# EAGLE board main (EAGLE 7.7.0)
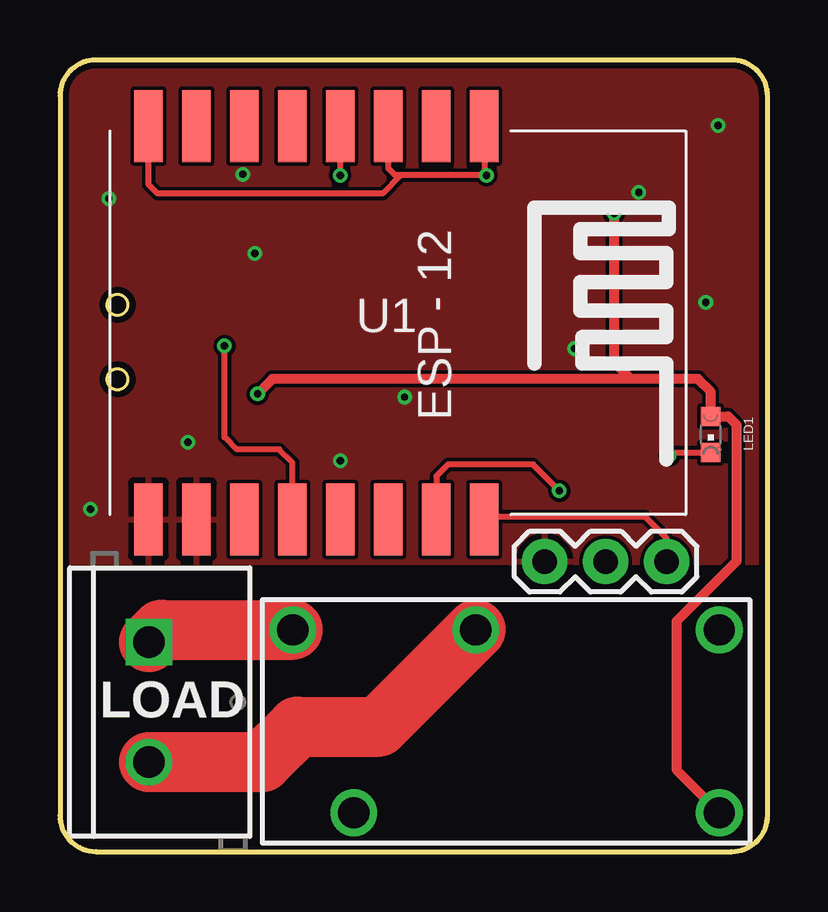
[diagram p0: board, top side]
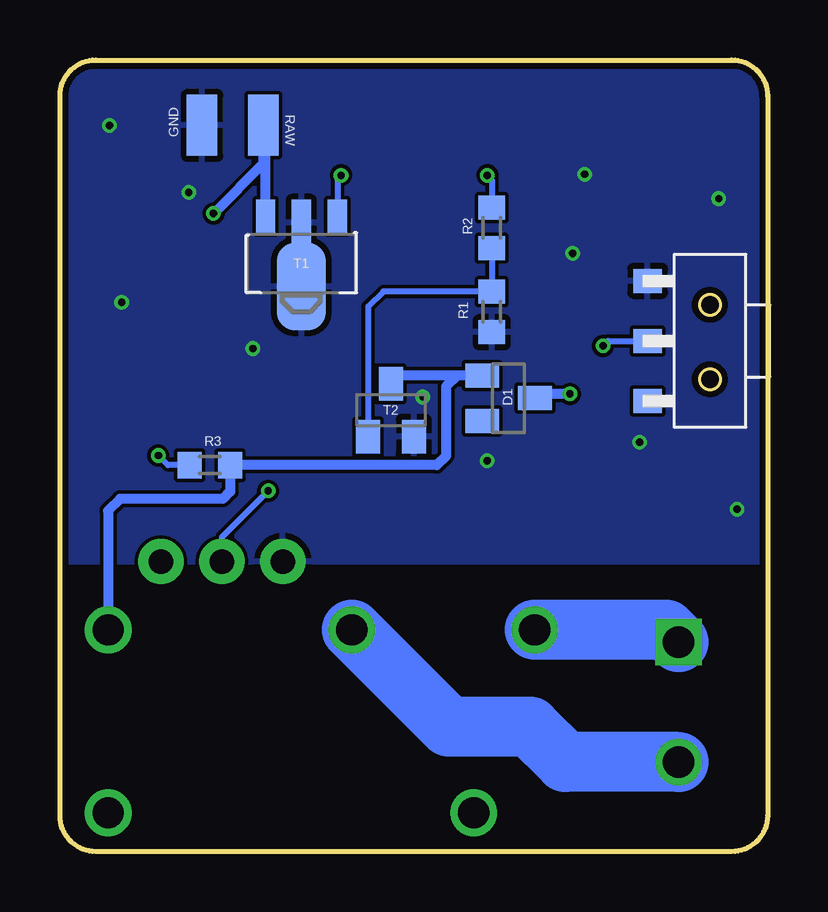
[diagram p1: board, bottom side, seen from below]

Size 29.5 x 33 mm. Coordinates in mm from the lower left corner, seen from the top.
Outline: 28,33 1.5,33 arc90 0,31.5 0,1.5 arc90 1.5,0 28,0 arc90 29.5,1.5 29.5,31.5 arc90 28,33
Copper layers (1*16): Top 0.035mm / dielectric 1.5mm / Bottom 0.035mm
Design rules "SeeedStudio_2layer_DRU": minimum track width 6mil, minimum drill 12mil, track to track 6mil, track to pad 6mil, pad to pad 6mil, via to via 6mil, smd to smd 0mil, copper to edge 10mil, drill to drill 10mil, minimum pad ring 10mil, minimum via ring 6mil, stop-mask expansion 2mil, vias tented up to drill 100mil, thermal gap 10mil

## Footprints (pad centres in the part's own frame; a part is rotated, then mirrored left to right if it is on the bottom)
SOT23 = smd 1 x 1.4: 1 -0.95,-1.1; 2 0.95,-1.1; 3 0,1.1
SMD1,27-2,54 = smd 1.27 x 2.54: 1 0,0
1X03 = drill 1.016 pad 1.88: 1 0,0; 2 2.54,0; 3 5.08,0
SCREWTERMINAL-5MM-2 = drill 1.3 square: 1 0,0 | drill 1.3: 2 5,0
CHIPLED_0603 = smd 0.8 x 0.8: A 0,-0.75; C 0,0.75
R0603 = smd 1 x 1.1: 1 -0.85,0; 2 0.85,0
SOT150P400X160-4N = smd 0.8 x 1.4: 1 -1.499,-1.981; 3 1.499,-1.981 | smd 0.8 x 1.9: 2 0,-1.727 | smd 2.032 x 3.65: 4 0,0.94
SOT23-BEC = smd 1 x 1.4: B -0.95,-1.1; C 0,1.1; E 0.95,-1.1
ESP12-SMD = smd 3 x 1.2: ADC -8.3,3.8; CH_PD -8.3,1.8; GND 8.1,-8.2; GPIO0 8.1,-2.2; GPIO2 8.1,-4.2; GPIO4 8.1,1.8; GPIO5 8.1,-0.2; GPIO12 -8.3,-4.2; GPIO13 -8.3,-6.2; GPIO14 -8.3,-2.2; GPIO15 8.1,-6.2; GPIO16 -8.3,-0.2; RESET -8.3,5.8; RXD0 8.1,3.8; TXD0 8.1,5.8; VCC -8.3,-8.2
RELAY-G5Q = drill 1.3: 1 8.89,3.81; 2 -1.27,3.81; 3 -8.89,3.81; 4 -6.35,-3.81; 5 8.89,-3.81
AYZ0203AGRLC = smd 1 x 1.2: P$1 0,2.6; P$2 -2.5,2.6; P$3 2.5,2.6

## Placement (x,y rotation side)
D1  [SOT23]  10.8,18.9 270 bottom
GND  WIREPADSMD1,27-254  [SMD1,27-2,54]  23.58,30.28 0 bottom
J1  [1X03]  25.29,12.09 180 top
JP3  Load  [SCREWTERMINAL-5MM-2]  3.71,8.73 270 top
LED1  [CHIPLED_0603]  27.13,17.39 180 top
R1  10k  [R0603]  11.5,22.5 90 bottom
R2  1k  [R0603]  11.5,26 90 bottom
R3  250  [R0603]  23.25,16.11 0 bottom
RAW  WIREPADSMD1,27-254  [SMD1,27-2,54]  21.02,30.28 0 bottom
T1  [SOT150P400X160-4N]  19.43,24.5 180 bottom
T2  [SOT23-BEC]  15.7,18.4 0 bottom
U1  [ESP12-SMD]  11.89,21.95 270 top
U$6  RELAYPTH  [RELAY-G5Q]  18.6,5.43 0 top
U$9  AYZ0203AGRLC  [AYZ0203AGRLC]  2.4,21.29 90 bottom

## Library data of the parts
D1 = semicon-smd-ipc
GND RAW = wirepad
J1 = SparkFun-Connectors
JP3 U$6 = SparkFun
LED1 = led
R1-R3 = rcl
T1 = STM-STM8S003_L78LxxUTR; MPN: L78L33ACUTR; OC_FARNELL: 2253467; OC_NEWARK: 89K1361; PACKAGE: SOT-89; SUPPLIER: STMicroelectronics
T2 = transistor
U1 = esp8266modules
U$9 = AYZ0203AGRLC

## Nets
3.3V: T1.1 U1.CH_PD U1.RESET U1.VCC
220-IN: JP3.1 U$6.3
220-OUT: JP3.2 U$6.2
COIL: D1.1 R3.2 T2.C U$6.1
GND: GND.1 J1.3 R1.1 T1.2 T1.4 T2.E U1.GND U1.GPIO15 U$9.P$3
N$1: LED1.C R3.1
N$3: U1.GPIO0 U$9.P$1
N$6: R1.2 R2.1 T2.B
RAW: D1.3 LED1.A RAW.1 T1.3 U$6.5
RELAY: R2.2 U1.GPIO16
RX: J1.2 U1.RXD0
TX: J1.1 U1.TXD0

## Tracks (layer width: path | path; a pad name or v marks a point on that pad's centre or on a via)
3.3V  (via drill 0.3)
  Top 0.254: U1.RESET 17.69,28.28 v17.78,28.19 14.22,28.19 | 14.22,28.19 13.97,28.19 13.69,28.47 U1.CH_PD | 14.22,28.19 13.46,27.43 4.06,27.43 3.69,27.81 U1.VCC
  Bottom 0.254: v17.78,28.19 17.93,28.04 T1.1
220-IN
  Top 2.5: JP3.1 4.22,9.24 U$6.3
  Bottom 2.5: JP3.1 4.22,9.24 U$6.3
220-OUT
  Top 2.5: JP3.2 8.43,3.73 9.9,5.2 13.29,5.2 U$6.2
  Bottom 2.5: JP3.2 8.43,3.73 9.9,5.2 13.29,5.2 U$6.2
COIL
  Bottom 0.254: 15.35,19.85 T2.C
  Bottom 0.406: U$6.1 27.49,14.21 27,14.7 22.7,14.7 22.4,15 R3.2 13.79,16.11 13.4,16.5 13.4,19.4 12.95,19.85 | 12.95,19.85 15.35,19.85 | D1.1 12.95,19.85
GND  (via drill 0.3)
  other vias: 14.37,18.95 7.62,28.24 8.13,24.93 2.03,27.22 1.27,14.27 26.93,22.9 21.45,20.97 24.13,27.47 27.43,30.27 11.69,16.3 5.34,17.06
  pour Top (rank 6): -0.84,12.06 34,12.06 34,36.5 -1,36.5
  pour Bottom (rank 6): -0.84,12.06 34,12.06 34,36.5 -1,36.5
N$1  (via drill 0.3)
  Top 0.254: v25.4,16.51 25.53,16.64 LED1.C
  Bottom 0.254: R3.1 25,16.11 v25.4,16.51
N$3  (via drill 0.3)
  Top 0.254: U1.GPIO0 9.69,16.22 9.14,16.76 7.37,16.76 6.86,17.27 v6.86,21.08
  Bottom 0.254: v6.86,21.08 6.65,21.29 U$9.P$1
N$6
  Bottom 0.254: R2.1 R1.2 16.02,23.35 16.65,22.72 T2.B
RAW  (via drill 0.3)
  Top 0.406: U$6.5 25.7,3.41 25.7,9.6 28.2,12.1 28.2,17.8 27.86,18.14 LED1.A 27.13,19.17 26.6,19.7 23.8,19.7 | 23.8,19.7 8.86,19.7 v8.24,19.08 | v23.1,26.6 23.1,20.4 23.8,19.7
  Bottom 0.254: 9.27,19.08 arc-45 D1.3
  Bottom 0.406: v8.24,19.08 9.52,19.08 D1.3 | T1.3 20.93,30.19 RAW.1 21.02,28.68 v23.1,26.6
RELAY  (via drill 0.3)
  Top 0.254: U1.GPIO16 v11.68,28.19
  Bottom 0.254: v11.68,28.19 11.5,28.01 R2.2
RX  (via drill 0.3)
  Top 0.254: v20.82,15.04 19.72,16.14 16.18,16.14 15.69,15.65 U1.RXD0
  Bottom 0.254: J1.2 22.75,13.11 v20.82,15.04
TX
  Top 0.254: U1.TXD0 17.81,13.97 24.38,13.97 25.29,13.06 J1.1

## Text on the board
tPlace: LOAD
tDocu: Gnd / Rx / Tx | 220V
bDocu: esp8266-power-outlet rev 0 | IN | 220V | OUT